# Altium PCB ADS1118_board.PcbDoc
Units mm, origin at the board's own origin, x right, y up, seen from the top; angles counter-clockwise.
Board outline 35 x 22 mm, 2 copper layers (Top Layer, Bottom Layer), stack 1.569 mm thick; 60 components, 32 nets, 158 pads, 77 vias.
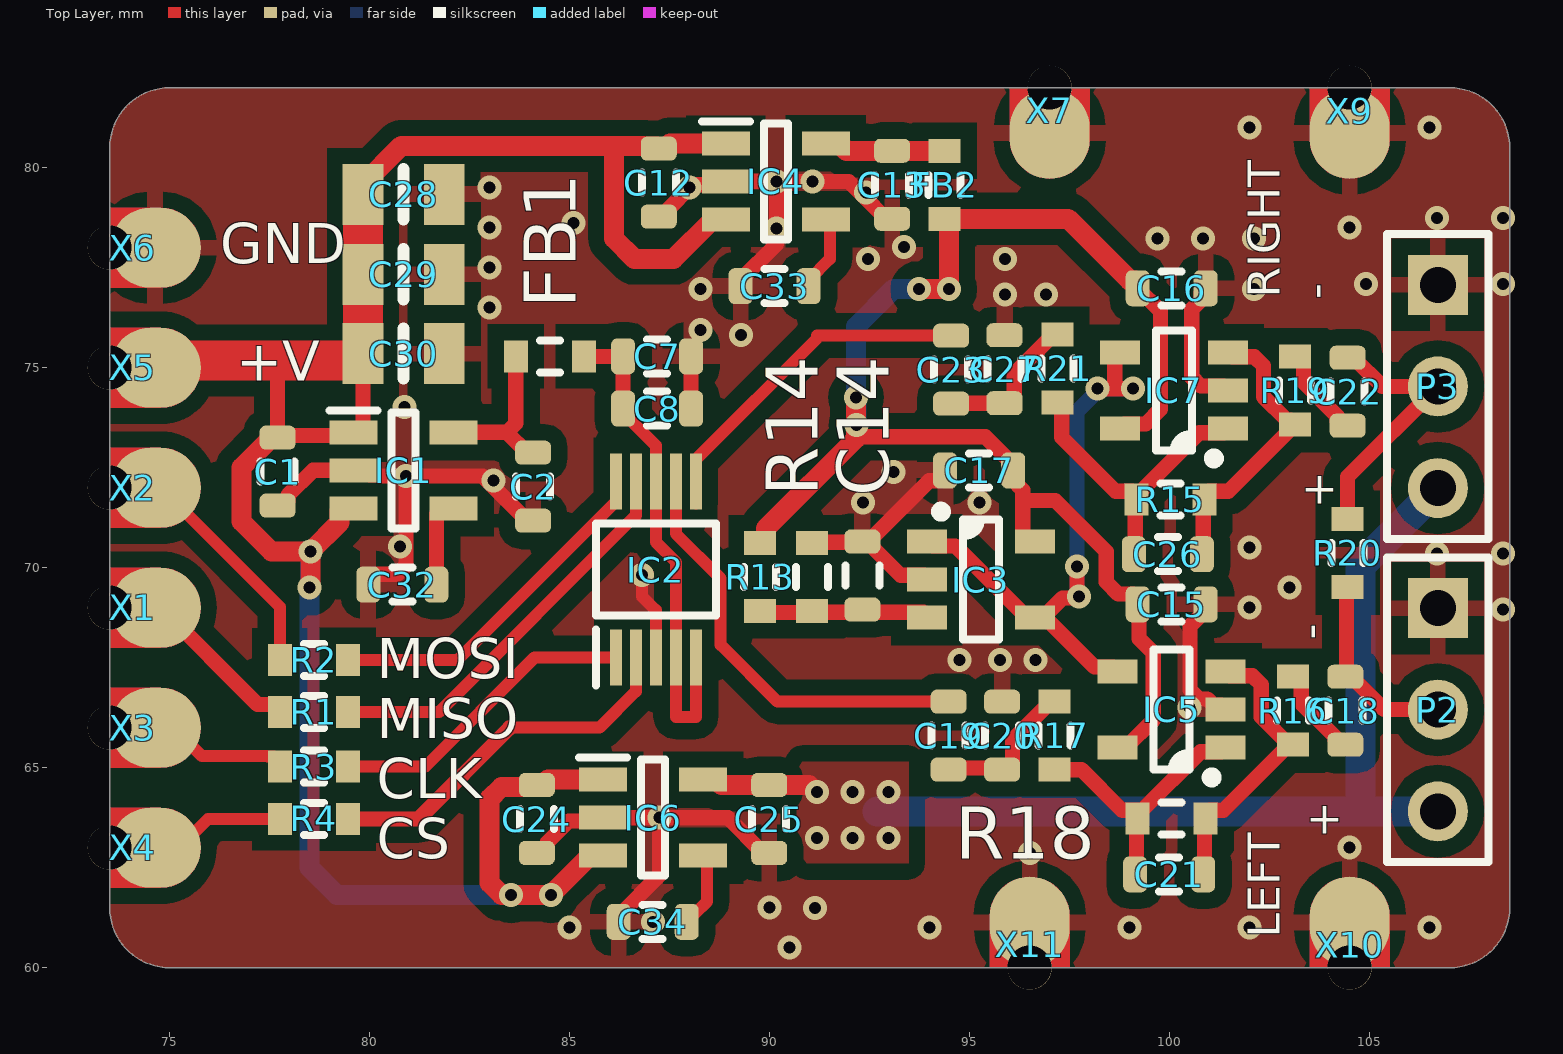
[diagram p0: Top Layer view]
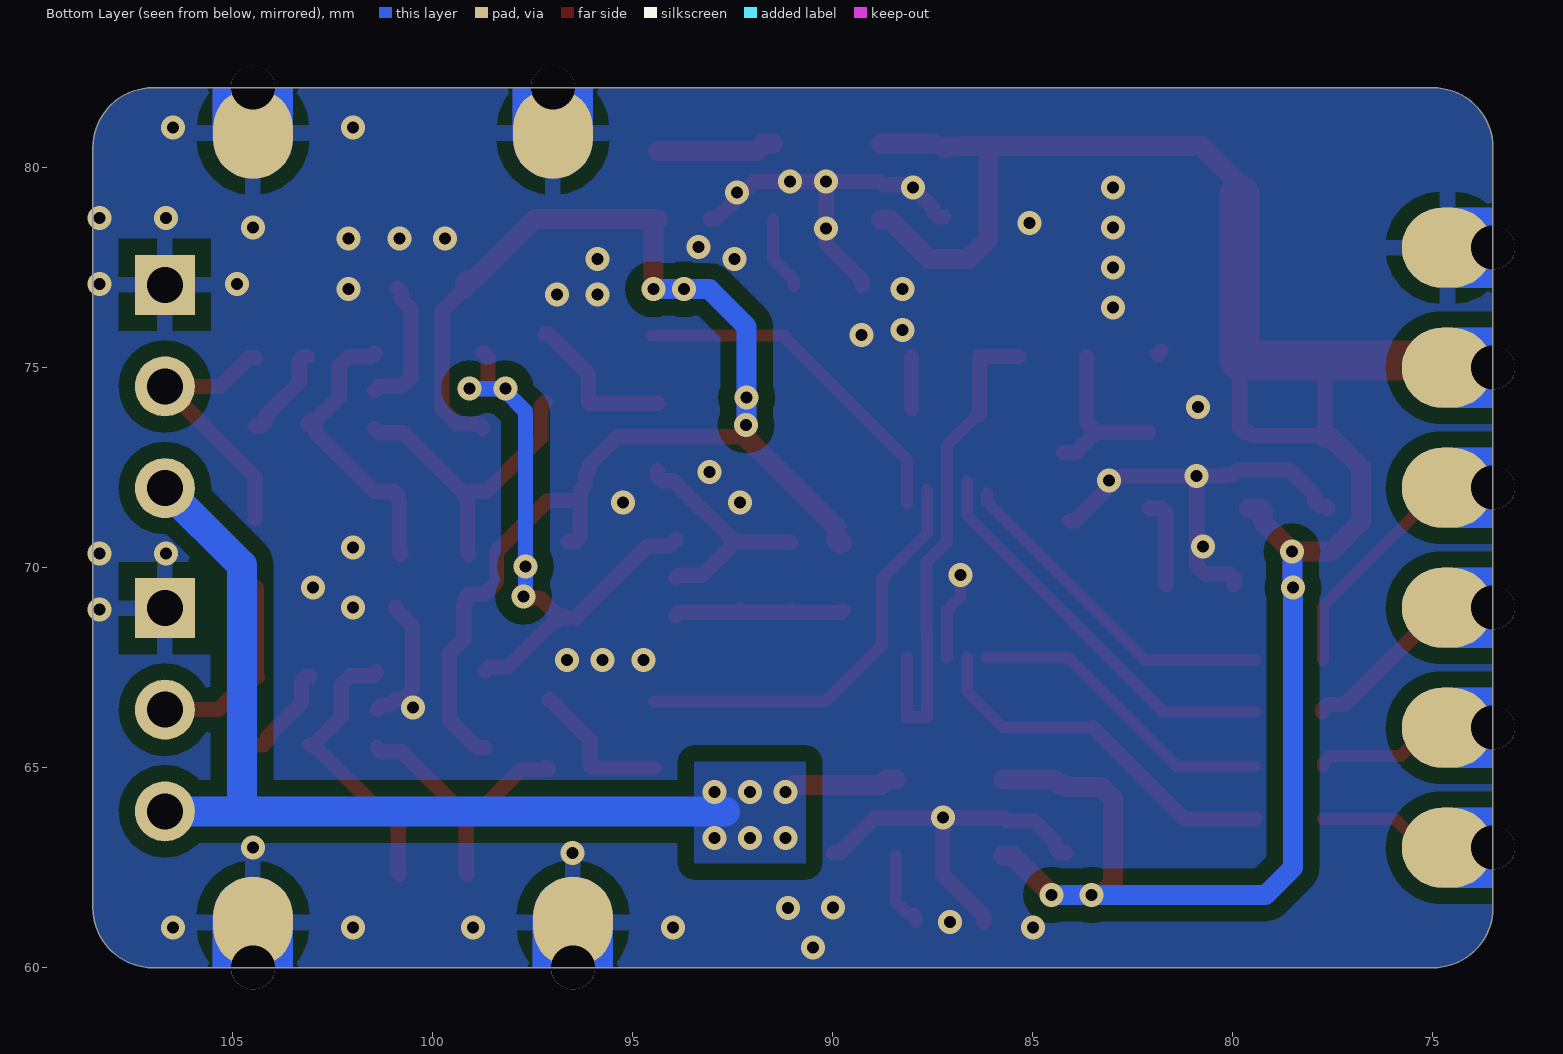
[diagram p1: Bottom Layer view, seen from below]
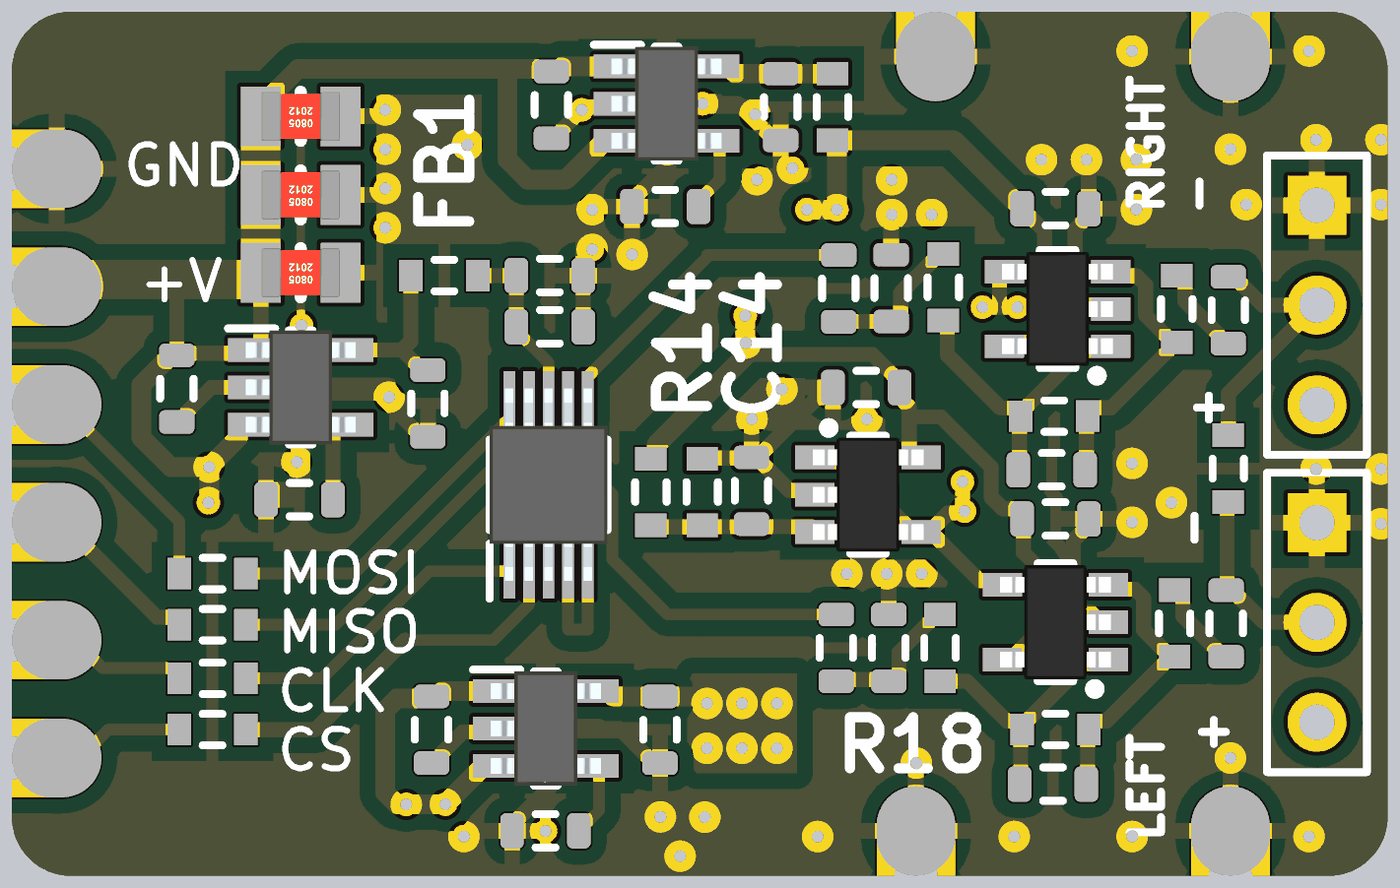
[diagram p2: 3D render of the assembled board from above, using the file's embedded part models]

## Layer stack, top to bottom
Top Solder: solder mask 0.0254, SM-001, Dk 4
Top Layer: signal copper 0.035
Dielectric 1: core 1.4986, Core-043, Dk 4.3
Bottom Layer: signal copper 0.035
Bottom Solder: solder mask 0.0254, SM-001, Dk 4

## Board outline
73.5,61.5 ccw(c75,61.5) 75,60 107,60 ccw(c107,61.5) 108.5,61.5 108.5,80.5 ccw(c107,80.5) 107,82 75,82 ccw(c75,80.5) 73.5,80.5

## Design rules (kind name [scope] priority, off if disabled: settings)
Clearance ClearancePol [InPoly] p1: gap=0.4 ignorepadtopadclearanceinfootprint=FALSE except(0: Arc-Hole Track-Hole SMDPad-Hole THPad-Hole Via-Hole Fill-Hole Poly-Hole Region-Hole Text-Hole)
Clearance Clearance_all [All] p2: gap=0.2 ignorepadtopadclearanceinfootprint=FALSE except(0: Arc-Hole Track-Hole SMDPad-Hole THPad-Hole Via-Hole Fill-Hole Poly-Hole Region-Hole Text-Hole)
ComponentClearance "Clearance Jumper" [(HasFootprint('Jumper NC') OR HasFootprint('Jumper NO'))] p1: gap=-0.5 collisioncheckmode=3 verticalgap=0.254 showdistances=FALSE
ComponentClearance "Clearance Coral" [(HasFootprint('Jumper NC') OR HasFootprint('Jumper NO'))] p2: gap=-0.5 collisioncheckmode=3 verticalgap=0.254 showdistances=FALSE
ComponentClearance "Clearance TEST" [(HasFootprint('test point 1mm'))] p3: gap=-0.5 collisioncheckmode=3 verticalgap=-0.5 showdistances=FALSE
ComponentClearance "Clearance PLS" [HasFootprint('PLS-1')] p4: gap=0 collisioncheckmode=3 verticalgap=0 showdistances=FALSE
ComponentClearance "Clearance PLS to PLS" [(HasFootprint('PLS-1 3D')) vs (HasFootprint('PLS-1 3D'))] p5: gap=-0.2 collisioncheckmode=3 verticalgap=0 showdistances=FALSE
ComponentClearance "Clearance PLS-4 to PLS-4" [(HasFootprint('PLS-4 3D')) vs (HasFootprint('PLS-4 3D'))] p6: gap=-0.2 collisioncheckmode=3 verticalgap=0 showdistances=FALSE
ComponentClearance [All] p7: gap=0.254 collisioncheckmode=3 verticalgap=0.254 showdistances=FALSE
DiffPairsRouting "DiffPairs USB" [(InNetClass('USB_HOST_1') OR InNetClass('USB_HOST_2') OR InNetClass('USB_HOST_3') OR InNetClass('USB_HOST_4'))] p1: maxlimit=0.2 minlimit=0.2 mostfreqgap=0.2 toplayer_minwidth=0.2 toplayer_maxwidth=0.2 toplayer_prefwidth=0.2 bottomlayer_minwidth=0.2 bottomlayer_maxwidth=0.2 bottomlayer_prefwidth=0.2 maxuncoupledlength=12.7
DiffPairsRouting "DiffPairs USB_CTRL" [InNetClass('USB_CTRL')] p2: maxlimit=0.2 minlimit=0.2 mostfreqgap=0.2 toplayer_minwidth=0.2 toplayer_maxwidth=0.2 toplayer_prefwidth=0.2 bottomlayer_minwidth=0.2 bottomlayer_maxwidth=0.2 bottomlayer_prefwidth=0.2 maxuncoupledlength=3
DiffPairsRouting "DiffPairs USB_CTRL_2" [InNetClass('USB_CTRL_2')] p3: maxlimit=0.2 minlimit=0.2 mostfreqgap=0.2 toplayer_minwidth=0.2 toplayer_maxwidth=0.2 toplayer_prefwidth=0.2 bottomlayer_minwidth=0.2 bottomlayer_maxwidth=0.2 bottomlayer_prefwidth=0.2 maxuncoupledlength=3
DiffPairsRouting [InNetClass('ETHERNET')] p4: maxlimit=0.2 minlimit=0.2 mostfreqgap=0.2 toplayer_minwidth=0.2 toplayer_maxwidth=0.2 toplayer_prefwidth=0.2 bottomlayer_minwidth=0.2 bottomlayer_maxwidth=0.2 bottomlayer_prefwidth=0.2 maxuncoupledlength=12.7
HoleSize [All] p1: absolutevalues=TRUE maxlimit=3.5 minlimit=0.025 maxpercent=80.000 minpercent=20.000
MatchedLengths USB2_RX [InNetClass('USB_CTRL_2')] p1: tolerance=0.2 checknetsindiffpair=TRUE checkdiffpairvsdiffpair=FALSE checkxsignals=FALSE checkothers=FALSE
MinimumSolderMaskSliver [All] p1: minsoldermaskwidth=0.01
PolygonConnect "Polygon to TEST PAD" [(HasFootprint('test point 1mm'))] p1: connectstyle=Direct reliefconductorwidth=0.254 reliefentries=4 polygonreliefangle="90 Angle" airgapwidth=0.254
PolygonConnect "Polygon to Battery" [HasFootprint('KEYS1042')] p2: connectstyle=Relief reliefconductorwidth=1 reliefentries=4 polygonreliefangle="90 Angle" airgapwidth=0.5
PolygonConnect "Polygon to VIA" [IsVia] p3: connectstyle=Direct reliefconductorwidth=0.254 reliefentries=4 polygonreliefangle="90 Angle" airgapwidth=0.254
PolygonConnect [All] p4: connectstyle=Relief reliefconductorwidth=0.4 reliefentries=4 polygonreliefangle="90 Angle" airgapwidth=0.4
RoutingVias [All] p1: holewidth=0.3 width=0.6 viastyle="Through Hole" minholewidth=0.3 minwidth=0.6 maxholewidth=0.3 maxwidth=0.6
SilkToSilkClearance [All] p1: silktosilkclearance=0.01
SilkToSolderMaskClearance [IsPad] p1: minsilkscreentomaskgap=0.01 clearancetoexposedcopper=TRUE
SolderMaskExpansion "SolderMask for VIA" [IsVia] p1: expansion=-0.5 istentingtop=FALSE
SolderMaskExpansion [All] p2: expansion=0.102 istentingtop=FALSE
ViasUnderSMD [All] p1: allowed=TRUE
Width "Width HSPEED ETH" [(InNetClass('ETH_RXD') OR InNetClass('ETH_TXD'))] p1: maxlimit=0.2 minlimit=0.2 preferedwidth=0.2
Width [All] p2: maxlimit=2 minlimit=0.2 preferedwidth=0.2
24 further rules are at their usual default settings.

## Classes and differential pairs
component class Analog: C12 C13 C14 C15 C16 C17 C18 C19 C20 C21 C22 C23 C24 C25 C26 C27 C33 C34 FB2 IC3 IC4 IC5 IC6 IC7 P2 P3 R13 R14 R15 R16 R17 R18 R19 R20 R21
component class ADC: C1 C2 C7 C8 C28 C29 C30 C32 FB1 IC1 IC2 R1 R2 R3 R4 X1 X2 X3 X4 X5 X6

## Components (designator, comment, footprint, x,y, rotation, side; value= is the part's Value field where it differs from the comment)
C1 "10µF" "CAP 0603_1608"#1 77.666,72.436 r90 top value=10ВµF
C2 "10µF" "CAP 0603_1608"#1 84.053,72.059 r90 top value=10ВµF
C7 "1µF" "CAP 0603_1608"#1 87.153,75.252 r180 top value=1ВµF
C8 "0.1µF" "CAP 0603_1608"#1 87.153,73.948 r180 top value=0.1ВµF
C12 "10µF" "CAP 0603_1608"#1 87.196,79.658 r90 top value=10ВµF
C13 "10µF" "CAP 0603_1608"#2 93.029,79.606 r90 top value=10ВµF
C14 "0.1µF" "CAP 0603_1608"#2 92.346,69.773 r270 top value=0.1ВµF
C15 "0.1µF" "CAP 0603_1608"#1 100.018,69.055 r180 top value=0.1ВµF
C16 "0.1µF" "CAP 0603_1608"#1 100.018,76.956 r180 top value=0.1ВµF
C17 "0.1µF" "CAP 0603_1608"#2 95.269,72.462 r0 top value=0.1ВµF
C18 "10µF" "CAP 0603_1608"#1 104.362,66.457 r90 top value=10ВµF
C19 "10 µF" "CAP 0603_1608"#1 94.442,65.833 r90 top value="10 ВµF"
C20 "0.1µF" "CAP 0603_1608"#1 95.841,65.769 r270 top value=0.1ВµF
C21 "10nF" "CAP 0603_1608"#1 100.018,62.365 r0 top
C22 "10µF" "CAP 0603_1608"#1 104.416,74.432 r90 top value=10ВµF
C23 "10 µF" "CAP 0603_1608"#1 94.506,74.984 r90 top value="10 ВµF"
C24 "10µF" "CAP 0603_1608"#1 84.148,63.75 r90 top value=10ВµF
C25 "10µF" "CAP 0603_1608"#1 89.957,63.75 r90 top value=10ВµF
C26 "10nF" "CAP 0603_1608"#1 99.986,70.368 r0 top
C27 "0.1µF" "CAP 0603_1608"#2 95.9,74.931 r270 top value=0.1ВµF
C28 "10uF" SMD-0805C 80.848,79.335 r90 top
C29 "10uF" SMD-0805C 80.848,77.335 r90 top
C30 "10uF" SMD-0805C 80.848,75.353 r90 top
C32 "100nF" "CAP 0603_1608"#1 80.848,69.606 r0 top
C33 "100nF" "CAP 0603_1608"#2 90.155,77.071 r0 top
C34 "100nF" "CAP 0603_1608"#1 87.107,61.176 r0 top
FB1 "=Value" "FER 0603_1608"#1 84.502,75.282 r0 top
FB2 "=Value" "FER 0603_1608"#2 94.374,79.574 r90 top
IC1 "TPS76350DBVR" SOT95P280X145-5N 80.848,72.436 r0 top
IC2 "ADS1118IDGSR" SOP50P490X110-10N 87.153,69.954 r90 top
IC3 "AD8541ARTZ-REEL7" "ANALOG SOT-23-5 RJ-5" 95.281,69.702 r0 top
IC4 "TPS76350DBVR" SOT95P280X145-5N 90.155,79.658 r0 top
IC5 "AD8541ARTZ-REEL7" "ANALOG SOT-23-5 RJ-5" 100.05,66.457 r180 top
IC6 "TPS76350DBVR" SOT95P280X145-5N 87.083,63.75 r0 top
IC7 "AD8541ARTZ-REEL7" "ANALOG SOT-23-5 RJ-5" 100.103,74.432 r180 top
P2 "Header 3" HDR1X3 106.702,68.991 r270 top
P3 "Header 3" HDR1X3 106.702,77.071 r270 top
R1 "0 Ohms" "RES 0603_1608"#1 78.605,66.392 r0 top
R2 "0 Ohms" "RES 0603_1608"#1 78.605,67.696 r0 top
R3 "0 Ohms" "RES 0603_1608"#1 78.605,65.025 r0 top
R4 "0 Ohms" "RES 0603_1608"#1 78.605,63.721 r0 top
R13 "10k Ohms" "RES 0603_1608"#1 89.757,69.773 r90 top
R14 "10k Ohms" "RES 0603_1608"#2 91.062,69.773 r270 top
R15 "100k Ohms" "RES 0603_1608"#1 100.018,71.703 r0 top
R16 "100 Ohms" "RES 0603_1608"#1 103.081,66.425 r90 top
R17 "100 Ohms" "RES 0603_1608"#1 97.115,65.801 r270 top
R18 "100k Ohms" "RES 0603_1608"#1 100.05,63.728 r0 top
R19 "100 Ohms" "RES 0603_1608"#1 103.134,74.432 r90 top
R20 "0 Ohms" "RES 0603_1608"#1 104.446,70.368 r90 top
R21 "100 Ohms" "RES 0603_1608"#1 97.195,74.984 r270 top
X1 "SPI_MISO" PLS-1 73.5,69 r90 top
X2 "SPI_MISO" PLS-1 73.5,72 r90 top
X3 "SPI_MISO" PLS-1 73.5,66 r90 top
X4 "SPI_MISO" PLS-1 73.5,63 r90 top
X5 "SPI_MISO" PLS-1 73.5,75 r90 top
X6 "SPI_MISO" PLS-1 73.5,78 r90 top
X7 "SPI_MISO" PLS-1 97,82 r0 top (schematic designator X4)
X9 "SPI_MISO" PLS-1 104.5,82 r0 top (schematic designator X4)
X10 "SPI_MISO" PLS-1 104.5,60 r180 top (schematic designator X4)
X11 "SPI_MISO" PLS-1 96.5,60 r180 top (schematic designator X4)

## Footprints (in the part's own frame and the unit in brackets; to place one, negate y for a bottom-side part, rotate by r counter-clockwise, add the part's x,y. Pads: shape width x height; smd on the part's side, far side on the other; paste and mask are expansions set on the pad)
"ANALOG SOT-23-5 RJ-5" [mm] "SOT23, 5-Leads, Body 2.90x2.80mm, Pitch 0.95mm, IPC Medium Density"
  rect 1x0.6 smd: 1(-1.35,0.95) 2(-1.35,0) 3(-1.35,-0.95) 4(1.35,-0.95) 5(1.35,0.95)
  silkscreen extent -1.12,-1.5 0.45,1.82, body extent -1.41,-1.45 1.41,1.45, height 1.5
"CAP 0603_1608"#1 [mm] "Chip Capacitor, 2-Leads, Body 1.60x0.80mm, IPC Medium Density"
  rrect50% 0.6x0.9 smd mask+0.05: 1(-0.882,-0.03) 2(0.818,-0.03)
  silkscreen extent -0.28,-0.46 0.22,0.39, body extent -0.83,-0.43 0.77,0.37, height 0.8
"CAP 0603_1608"#2 [mm] "Chip Capacitor, 2-Leads, Body 1.60x0.80mm, IPC Medium Density"
  rrect50% 0.6x0.9 smd: 1(-0.882,-0.03) 2(0.818,-0.03)
  silkscreen extent -0.28,-0.46 0.22,0.39, body extent -0.83,-0.43 0.77,0.37, height 0.8
"FER 0603_1608"#1 [mm] "Chip Ferrite, 2-Leads, Body 1.60x0.80mm, IPC Medium Density"
  rect 0.6x0.8 smd mask+0.05: 1(-0.85,0) 2(0.85,0)
  silkscreen extent -0.25,-0.4 0.25,0.4, body extent -0.77,-0.42 0.78,0.43, height 0.45
"FER 0603_1608"#2 [mm] "Chip Ferrite, 2-Leads, Body 1.60x0.80mm, IPC Medium Density"
  rect 0.6x0.8 smd: 1(-0.85,0) 2(0.85,0)
  silkscreen extent -0.25,-0.4 0.25,0.4, body extent -0.77,-0.42 0.78,0.43, height 0.45
HDR1X3 [mm] "Connector; Header; 3 Position"
  rect 1.5x1.5 hole 0.9: 1(0,0)
  round 1.5 hole 0.9: 2(2.54,0) 3(5.08,0)
  silkscreen extent -1.27,-1.27 6.35,1.27
PLS-1 [mm]
  round 1.1 hole 1.1 mask+0: 1(0,0)
  oval 2x2.27 smd mask+0: 1(0,-1.143)
  oval 2x2.27 smd far side mask+0: 1(0,-1.143)
  Multi-Layer region: -1,-1.27 -0.901,-1.704 -0.623,-2.052 -0.223,-2.245 0.223,-2.245 0.623,-2.052 0.901,-1.704 1,-1.27 1,-1.27 1,0 -1,0
"RES 0603_1608"#1 [mm] "Chip Resistor, 2-Leads, Body 1.60x0.80mm, IPC Medium Density"
  rect 0.6x0.8 smd mask+0.05: 1(-0.85,0) 2(0.85,0)
  silkscreen extent -0.25,-0.4 0.25,0.4, body extent -0.77,-0.42 0.78,0.43, height 0.45
"RES 0603_1608"#2 [mm] "Chip Resistor, 2-Leads, Body 1.60x0.80mm, IPC Medium Density"
  rect 0.6x0.8 smd: 1(-0.85,0) 2(0.85,0)
  silkscreen extent -0.25,-0.4 0.25,0.4, body extent -0.77,-0.42 0.78,0.43, height 0.45
SMD-0805C [mil]
  rect 60x40 smd: 1(0,40) 2(0,-40)
  silkscreen extent -25,0 25,0, body extent -25,-39 25,39, height 35
SOP50P490X110-10N [mm]
  rect 1.4x0.3 smd: 1(-2.2,1) 2(-2.2,0.5) 3(-2.2,0) 4(-2.2,-0.5) 5(-2.2,-1) 6(2.2,-1) 7(2.2,-0.5) 8(2.2,0) 9(2.2,0.5) 10(2.2,1)
  silkscreen extent -2.9,-1.5 1.15,1.5, body extent -2.45,-1.5 2.45,1.5, height 1.1
SOT95P280X145-5N [mm]
  rect 1.2x0.6 smd: 1(-1.25,0.95) 2(-1.25,0) 3(-1.25,-0.95) 4(1.25,-0.95) 5(1.25,0.95)
  silkscreen extent -1.85,-1.45 0.3,1.5, body extent -1.4,-1.45 1.4,1.45, height 1.45

## Part data
C1 C2 C7 C8 C12 C13 C14 C15 C16 C17 C18 C19 C20 C21 C22 C23 C24 C25 C26 C27 C32 C33 C34: library part 100X14W104MV4T, "CAP CER 0.1UF 10V X7R 0603", Part Number=100X14W104MV4T
C28 C29 C30: library part GRJ21BR71A106KE01L, "CAP CER 10UF 10V X7R 0805", Digi-Key Part Number=490-10919-1-ND, Manufacturer="Murata Electronics North America", Operating Temperature="-55В°C ~ 125В°C", Package / Case="0805 (2012 Metric)", Ratings=-, Temperature Coefficient=X7R, Tolerance=В±10%, Voltage=10V, @ qty=0, Applications="Boardflex Sensitive", Datasheets=http://www.murata.com/~/media/webrenewal/support/library/catalog/products/capacitor/mlcc/c02e.pdf, Factory Stock=0, Features="Soft Termination", Height - Seated (Max)=-, Image=//media.digikey.com/Renders/Murata%20Renders/0805%20(2012%20Metric)%20.85mm.jpg, Lead Spacing=-, Lead Style=-, Minimum Quantity=1, Mounting Type="Surface Mount, MLCC", Packaging="Cut Tape (CT)", Part Number=GRJ21BR71A106KE01L, Part Status=Active, Quantity Available=6658, Series=GRJ, Size / Dimension="0.079\" L x 0.049\" W (2.00mm x 1.25mm)", Thickness (Max)="0.057\" (1.45mm)", Unit Price (USD)=0,69
FB1 FB2: library part 2506031217H0, "FERRITE BEAD 0603 1LN", Part Number=2506031217H0
IC1 IC4 IC6: "Integrated Circuit", Manufacturer_Name="Texas Instruments", Mouser Part Number=595-TPS76350DBVR, Arrow Part Number=TPS76350DBVR, Arrow Price/Stock=https://www.arrow.com/en/products/tps76350dbvr/texas-instruments, Datasheet Link=https://www.ti.com/lit/gpn/TPS763, Height=1.45mm, Manufacturer_Part_Number=TPS76350DBVR, Mouser Price/Stock=https://www.mouser.co.uk/ProductDetail/Texas-Instruments/TPS76350DBVR?qs=8yeEWhuAOtMYKUfRRdAKSw%3D%3D
IC2: "Integrated Circuit", Manufacturer_Name="Texas Instruments", Mouser Part Number=595-ADS1118IDGSR, Arrow Part Number=ADS1118IDGSR, Arrow Price/Stock=https://www.arrow.com/en/products/ads1118idgsr/texas-instruments?region=nac, Datasheet Link=http://www.ti.com/lit/gpn/ads1118, Height=1.1mm, Manufacturer_Part_Number=ADS1118IDGSR, Mouser Price/Stock=https://www.mouser.co.uk/ProductDetail/Texas-Instruments/ADS1118IDGSR?qs=g5raLcSarOb4n6jVZI8bUw%3D%3D
IC3 IC5 IC7: "IC OPAMP GP 1 CIRCUIT SOT23-5", Current - Input Bias=4pA, Current - Output / Channel=30mA, Current - Supply=45ВµA, Device Package="SC-74A, SOT-753", Manufacturer="Analog Devices Inc.", Operating Temperature="-40В°C ~ 125В°C", Supplier Device Package=SOT-23-5, Supplier Part Number 1=AD8541ARTZ-REEL7CT-ND, Voltage - Input Offset=1mV, Voltage - Supply, Single/Dual (В±)="2.7V ~ 5.5V", Amplifier Type="General Purpose", ComponentLink1Description=Datasheet, ComponentLink1URL=https://www.analog.com/media/en/technical-documentation/data-sheets/AD8541_8542_8544.pdf, ComponentLink2Description="DigiKey Link", ComponentLink2URL=http://digikey.com/product-detail/en/analog-devices-inc/AD8541ARTZ-REEL7/AD8541ARTZ-REEL7CT-ND/813416, Gain Bandwidth Product=1MHz, LastUpdated="08.01.2020 23:39:15", Lifecycle Status=Active, Minimum Order=1, Mounting Type="Surface Mount", Number of Circuits=1, Output Type=Rail-to-Rail, Package / Case="SC-74A, SOT-753", Packaging=ReReel, Part Number=AD8541ARTZ-REEL7, Part Status=Active, PartId=9, Price=0.00, Series=-, Slew Rate=0.92V/Вµs, Supplier 1=DigiKey
P2 P3: "Header, 3-Pin", LatestRevisionDate=17-Jul-2002, LatestRevisionNote="Re-released for DXP Platform.", Publisher="Altium Limited"
R1 R2 R3 R4 R13 R14 R15 R16 R17 R18 R19 R20 R21: library part RNCS0603BKE100R, "RES 100 OHM 0.1% 1/16W 0603", Part Number=RNCS0603BKE100R
X1 X2 X3 X4 X5 X6 X7 X9 X10 X11: Manufacturer=KHADB, ID="IN-OUT pin"
  X1: Name=SPI_MISO
  X2: Name=SPI_MOSI
  X3: Name=SPI_SCK
  X4 X7 X9 X10 X11: Name=SPI_CS
  X5: Name=POWER
  X6: Name=GND

## Via types
v1: diameter 0.6, hole 0.3, Top Layer to Bottom Layer, 77 vias

## Nets (pads, with @x,y where several pads share a name; then routed paths per layer and width w, separated by ;. In a path a pad name is that pad's centre, name@x,y a point inside that pad or via, vN(x,y) a via of type N, cw(c..) or ccw(c..) an arc to the next point about the centre after c; other vN are vias at no path point)
+3V3: C2.2 FB1.1 IC1.5 | length 4.3
  Top Layer w0.381: IC1.5 83.425,73.386 ; FB1.1 83.652,73.613 83.425,73.386 ; C2.2@84.233,72.877 C2.2 83.933,72.877 83.425,73.386
+3VA: C13.2 FB2.2 IC4.5 | length 2.9
  Top Layer w0.5: IC4.5@91.505,80.608 91.73,80.608 91.915,80.424 C13.2 FB2.2
+AVCC: C15.2 C16.2 C17.2 FB2.1 IC3.5 IC5.5 IC7.5 R13.2 | length 37.8
  Top Layer w0.381: 92.156,73.233 92.195,73.272 95.396,73.272 96.087,72.581 C17.2 96.196,72.322 96.196,72.073 96.325,71.945 96.325,71.683 ; IC3.5 96.434,70.652 96.325,70.762 96.325,71.683 ; IC5.5 98.9,65.507 99.59,66.197 99.59,67.869 99.232,68.227 99.232,69.053 C15.2 99.2,69.235 99.09,69.344 98.71,69.344 98.413,69.641 98.413,70.407 97.137,71.683 96.325,71.683 ; IC7.5 98.863,73.592 99.4,73.592 99.772,73.964 99.772,76.414 C16.2
  Top Layer w0.5: R13.2 89.857,70.623 89.907,70.673 89.907,70.984 92.156,73.233 92.156,73.566 v1(92.156,74.261) ; v1(93.726,76.962) v1(94.488,76.962) 94.488,78.609 FB2.1 97.462,78.724 99,77.186 99.15,77.186 99.2,77.136 C16.2
  Bottom Layer w0.5: v1(92.172,73.566) 92.164,73.574 92.164,74.253 v1(92.156,74.261) 92.156,76.027 93.091,76.962 v1(93.726,76.962) v1(94.488,76.962)
+V_EXT: C1.2 C12.2 C24.2 C28.1 C29.1 C30.1 IC1.1 IC1.3 IC4.1 IC4.3 IC6.1 IC6.3 X5.1 | length 60.5
  Top Layer w0.3: C1.2@77.42,73.127 77.57,73.127 C1.2
  Top Layer w0.381: 78,75.177 77.697,74.873 C1.2 77.749,73.305 79.518,73.305 IC1.1 79.723,73.386 79.832,73.495 79.832,75.169 C30.1@79.824,75.177
  Top Layer w0.5: C1.2 77.547,73.253 77.42,73.127 76.797,72.503 76.797,71.155 77.545,70.406 v1(78.519,70.406) ; v1(78.5,69.5) 78.519,69.519 v1(78.519,70.406) ; IC1.3 79.298,71.486 79.248,71.436 79.248,71.135 v1(78.519,70.406) ; C28.1 79.832,79.589 80.79,80.547 86.035,80.547 ; IC6.3@85.733,62.8 85.508,62.8 v1(84.531,61.823) 83.293,61.823 83,62.116 83,64.225 83.293,64.518 84.128,64.518 C24.2 84.328,64.568 84.461,64.7 IC6.1@85.733,64.7 ; C12.2 87.176,80.526 86.868,80.526 86.847,80.547 86.035,80.547 ; C12.2@87.509,80.608 IC4.1@88.805,80.608 ; IC4.3@88.805,78.708 88.58,78.708 87.596,77.724 86.614,77.724 86.106,78.232 86.106,80.476 86.035,80.547
  Top Layer w1: X5.1@74.643,75 74.82,75.177 78,75.177 79.824,75.177 79.832,75.185 C30.1 C29.1 C28.1
  Bottom Layer w0.5: v1(78.519,70.406) 78.51,70.397 78.51,69.51 v1(78.5,69.5) 78.5,62.5 79.182,61.818 v1(83.533,61.818) 83.535,61.821 84.528,61.821 v1(84.531,61.823)
+V_OUT: C25.2 IC6.5 P2.3 P3.3 | length 25.8
  Top Layer w0.5: IC6.5@88.433,64.7 88.658,64.7 88.79,64.568 C25.2 90.98,64.568 91.159,64.389 v1(91.186,64.389)
  Bottom Layer w0.75: 92.698,63.911 104.775,63.911 ; P2.3 104.775,63.911 ; P3.3 104.775,70.064 104.775,63.911
  other v1: 91.186,63.246 92.075,63.246 92.964,63.246 92.075,64.389 92.964,64.389
+VREF: IC3.1 IC3.4 IC5.4 IC7.4 | length 16.1
  Top Layer w0.381: IC3.1@93.931,70.697 94.084,70.543 94.64,70.543 IC3.4@96.431,68.752 ; IC3.4 96.831,68.752 97.32,69.242 97.649,69.242 97.695,69.242 v1(97.737,69.283) 97.737,69.343 97.685,69.395 v1(97.685,70.032) ; IC3.4@96.781,68.802 96.94,68.643 96.992,68.643 98.119,67.516 98.59,67.516 IC5.4 ; v1(98.193,74.477) 98.624,74.477 ; IC7.4 98.733,75.382 98.624,75.273 98.624,74.477 ; v1(99.082,74.477) 98.624,74.477
  Bottom Layer w0.381: v1(97.737,69.283) 97.737,69.343 97.685,69.395 97.685,73.91 98.193,74.418 v1(98.193,74.477) v1(99.082,74.477)
ADC_LEFT: C19.2 IC2.7 | length 10.6
  Top Layer w0.3: IC2.7@87.653,71.949 87.653,70.851 88.773,69.731 88.773,68.072 90.194,66.651 C19.2
ADC_RIGHT: C23.2 IC2.6 | length 8.8
  Top Layer w0.3: IC2.6@88.153,71.605 IC2.6 88.153,72.704 91.186,75.737 91.186,75.802 C23.2
GND: C1.1 C2.1 C7.1 C8.1 C12.1 C13.1 C14.1 C15.1 C16.1 C17.1 C20.1 C24.1 C25.1 C27.1 C28.2 C29.2 C30.2 C32.1 C33.1 C34.1 IC1.2 IC2.3 IC3.2 IC4.2 IC5.2 IC6.2 IC7.2 P2.1 P3.1 R14.1 X6.1 X7.1 X9.1 X10.1 X11.1 | length 46.4
  Top Layer w0.3: v1(86.813,69.819) 86.813,69.278 87.153,68.938 IC2.3
  Top Layer w0.381: C1.1@77.63,71.486 C1.1 77.847,71.553 77.956,71.663 77.956,71.813 78.579,72.436 79.898,72.436 80.008,72.326 80.196,72.326 80.231,72.291 v1(80.907,72.291) ; C32.1 79.966,69.726 80.076,69.836 80.684,69.836 80.907,70.059 v1(80.907,72.291) ; C30.2@81.797,75.42 C30.2 C30.2@81.879,75.339 ; C2.1 83.933,71.177 82.819,72.291 v1(80.907,72.291) ; C24.1 84.328,62.868 84.438,62.977 84.438,63.127 84.976,63.666 85.648,63.666 85.733,63.75 v1(87.248,63.75) ; C34.1 86.225,61.296 87.248,62.319 v1(87.248,63.75) ; C12.1 87.376,78.776 87.486,78.886 87.486,78.986 v1(88,79.5) ; C8.1 C7.1 ; v1@88.174,79.574 88.721,79.574 88.805,79.658 v1(90.17,79.658) ; C33.1 89.273,77.191 90.17,78.088 v1(90.17,78.486) v1(90.17,79.658) ; C25.1 89.837,62.868 88.955,63.75 v1(87.248,63.75) ; R14.1 91.078,70.639 92.3,70.639 C14.1 C14.1@92.466,70.655 ; C13.1 92.909,78.724 92.327,79.305 91.975,79.658 v1(91.072,79.658) v1(90.17,79.658) ; IC3.2@93.931,69.747 93.865,69.812 93.274,69.812 92.575,70.51 92.575,70.545 C14.1@92.466,70.655 ; C17.1 94.387,72.281 94.277,72.172 93.983,72.172 C14.1@92.466,70.655 ; C16.1 100.79,76.877 100.79,76.707 100.552,76.468 100.552,74.765 100.775,74.542 101.344,74.542 IC7.2 ; C15.1@100.932,69.011 100.932,68.967 100.509,68.544 100.509,66.945 100.738,66.716 100.94,66.716 101.09,66.566 101.29,66.566 IC5.2
  other v1: 90.5,60.5 85,61 94,61 99,61 102,61 106.5,61 87.077,61.139 90,61.5 91.13,61.493 96.51,62.87 104.5,63 100.5,66.5 94.742,67.691 95.758,67.691 96.647,67.691 108.331,68.961 102,69 103,69.5 106.68,70.358 108.331,70.358 102,70.5 80.751,70.535 92.329,71.628 95.25,71.628 83.098,72.185 93.091,72.39 80.87,74.014 89.281,75.819 88.265,75.946 83,76.5 95.885,76.835 96.901,76.835 88.265,76.962 102.108,76.962 104.902,77.089 108.331,77.089 83,77.5 92.456,77.724 95.885,77.724 93.359,78.013 99.695,78.232 100.838,78.232 102.108,78.232 83,78.5 104.5,78.5 85.09,78.613 106.68,78.74 108.331,78.74 92.405,79.383 83,79.5 102,81 106.5,81
NetC7_2: C7.2 C8.2 FB1.2 IC2.4 IC2.5 IC2.8 | length 12.6
  Top Layer w0.3: C8.2@86.381,73.828 87.153,73.056 IC2.8 87.153,70.644 87.661,70.136 87.661,68.4 87.653,68.392 IC2.4 87.653,66.271 88.153,66.271 IC2.5
  Top Layer w0.381: FB1.2 C7.2 C8.2 86.335,73.828 C8.2@86.381,73.828
NetC14_2: C14.2 IC3.3 R13.1 R14.2 | length 4.3
  Top Layer w0.381: R13.1 89.799,68.88 91.02,68.88 R14.2 91.1,68.885 92.246,68.885 C14.2 92.386,68.885 93.842,68.885 IC3.3@93.931,68.797
NetC18_1: C18.1 R16.2 | length 2.4
  Top Layer w0.381: R16.2 103.177,67.275 103.287,67.165 103.287,66.621 104.133,65.775 104.133,65.684 104.243,65.575 C18.1
NetC18_2: C18.2 P2.2 R20.1 | length 4.9
  Top Layer w0.381: R20.1 104.419,69.492 104.419,67.301 C18.2 104.543,67.275 105.361,66.457 P2.2@106.648,66.457
NetC19_1: C19.1 C20.2 R17.1 | length 3.7
  Top Layer w0.381: C19.1@94.472,64.996 96.005,64.996 96.07,65.061 96.07,65.696 96.905,66.532 96.905,66.542 97.059,66.696 R17.1@97.115,66.696
NetC21_1: C21.1 IC5.1 R17.2 R18.1 | length 7.1
  Top Layer w0.381: R17.2 97.797,64.951 98.812,63.937 R18.1@99.309,63.937 ; R17.2@97.115,64.996 R17.2@97.215,64.996 ; C21.1 99.168,62.367 99.168,63.696 R18.1 99.2,63.828 R18.1@99.309,63.937 ; IC5.1 101.29,65.397 100.77,65.397 R18.1@99.309,63.937
NetC21_2: C21.2 IC5.3 R16.1 R18.2 | length 7.2
  Top Layer w0.381: C21.2 100.868,62.367 100.868,63.696 R18.2 100.9,63.828 101.009,63.937 101.343,63.937 R16.1@102.981,65.575 ; IC5.3 101.509,67.297 102.067,67.297 102.29,67.074 102.29,66.265 R16.1@102.981,65.575 ; R16.1 R16.1@102.981,65.575
NetC22_1: C22.1 R19.2 | length 2.4
  Top Layer w0.381: R19.2 103.234,75.282 103.344,75.173 103.344,74.637 104.186,73.794 104.186,73.659 104.296,73.55 C22.1
NetC22_2: C22.2 P3.2 R20.2 | length 6.8
  Top Layer w0.381: R20.2 104.446,72.275 P3.2 105.315,74.531 104.596,75.25 C22.2
NetC23_1: C23.1 C27.2 R21.1 | length 4
  Top Layer w0.381: C23.1@94.383,74.113 96.111,74.113 96.111,74.84 96.711,75.439 96.711,75.441 96.986,75.716 96.986,75.725 97.095,75.834 R21.1
NetC26_1: C26.1 IC7.1 R15.1 R21.2 | length 7.7
  Top Layer w0.381: R21.2 97.298,74.031 97.298,73.263 98.649,71.912 99.058,71.912 99.168,71.803 R15.1 99.136,71.671 99.136,70.37 C26.1 ; R15.1@99.277,71.912 100.738,73.373 101.344,73.373 IC7.1
NetC26_2: C26.2 IC7.3 R15.2 R19.1 | length 7.4
  Top Layer w0.381: C26.2 100.836,70.37 100.836,71.671 R15.2 100.868,71.803 100.977,71.912 101.465,71.912 102.925,73.373 102.925,73.473 103.034,73.582 R19.1 103.025,73.692 102.925,73.692 102.344,74.273 102.344,75.049 102.121,75.273 101.563,75.273 IC7.3
NetC32_2: C32.2 IC1.4 | length 2.3
  Top Layer w0.381: C32.2 81.666,71.353 81.798,71.486 IC1.4
NetC33_2: C33.2 IC4.4 | length 1.9
  Top Layer w0.3: C33.2 90.973,77.191 91.505,77.723 IC4.4@91.505,78.708
NetC34_2: C34.2 IC6.4 | length 2
  Top Layer w0.3: C34.2 87.925,61.296 87.975,61.346 88.125,61.346 88.433,61.653 IC6.4@88.433,62.8
NetIC2_1: IC2.1 R3.2 | length 7.8
  Top Layer w0.3: R3.2 81.389,65.025 84.118,67.754 IC2.1
NetIC2_2: IC2.2 R4.2 | length 9.4
  Top Layer w0.3: 83.5,66 85.744,66 86.653,66.909 IC2.2
  Top Layer w0.381: R4.2 81.221,63.721 83.5,66
NetIC2_9: IC2.9 R1.2 | length 10.1
  Top Layer w0.3: R1.2 81.735,66.392 86.653,71.309 IC2.9
NetIC2_10: IC2.10 R2.2 | length 8.6
  Top Layer w0.3: R2.2 82.196,67.696 86.153,71.653 IC2.10@86.153,71.87
SPI0_CS: R4.1 X4.1 | length 3.4
  Top Layer w0.3: X4.1@74.643,63 75.238,63 75.959,63.721 R4.1
SPI0_MISO: R1.1 X1.1 | length 4.2
  Top Layer w0.381: X1.1@74.643,69 74.778,69 77.197,66.581 77.645,66.581 77.755,66.471 R1.1
SPI0_MOSI: R2.1 X2.1 | length 5.9
  Top Layer w0.3: X2.1@74.643,72 74.778,72 77.755,69.023 R2.1
  Top Layer w0.381: X2.1@74.778,72 X2.1@75.05,72
SPI0_SCK: R3.1 X3.1 | length 3.6
  Top Layer w0.3: X3.1@74.643,66 75.098,66 75.804,65.294 77.429,65.294 77.448,65.275 77.605,65.275 77.755,65.125 R3.1

## Polygon pours and split planes (outlines as drawn)
GND on Bottom Layer "NONET_L-01_P-001" (solid, pour order 5): 108.5,80.5 ccw(c107,80.5) 107,82 75,82 ccw(c75,80.5) 73.5,80.5 73.5,61.5 ccw(c75,61.5) 75,60 107,60 ccw(c107,61.5) 108.5,61.5
+V_OUT on Bottom Layer "NONET_L-01_P-001" (solid, pour order 1): 93.472,65.151 93.472,62.611 90.678,62.611 90.678,65.151
GND on Top Layer "NONET_L-01_P-001" (solid, pour order 6): 108.5,80.5 ccw(c107,80.5) 107,82 75,82 ccw(c75,80.5) 73.5,80.5 73.5,61.5 ccw(c75,61.5) 75,60 107,60 ccw(c107,61.5) 108.5,61.5
+V_OUT on Top Layer "NONET_L-01_P-001" (solid, pour order 4): 93.472,65.151 93.472,62.611 90.678,62.611 90.678,65.151

## Silkscreen, mask and mechanical layers (free items; w line width, h text height)
Top Overlay:
  text "GND" at 76.259,77.616 h1
  text "RIGHT" at 102.746,76.754 h0.8 r90
  text "-" at 104.032,76.708 h0.8 r90
  text "+V" at 76.661,74.67 h1
  text "+" at 103.291,71.602 h0.8
  text "-" at 103.905,68.199 h0.8 r90
  text "MOSI" at 80.17,67.233 h1
  text "MISO" at 80.17,65.733 h1
  text "CLK" at 80.17,64.233 h1
  text "+" at 103.418,63.347 h0.8
  text "CS" at 80.17,62.733 h1
  text "LEFT" at 102.746,60.754 h0.8 r90
Board:
  lines w0.2: 73.5,61.5 ccw(c75,61.5) 75,60 107,60 ccw(c107,61.5) 108.5,61.5 108.5,62.77 108.5,80.5 ccw(c107,80.5) 107,82 75,82 ccw(c75,80.5) 73.5,80.5 73.5,61.5